# Altium PCB ACT01_RS232 V3.0.PcbDoc
Units mm, origin at the board's own origin, x right, y up, seen from the top; angles counter-clockwise.
Board outline 36 x 28 mm, 2 copper layers (Top Layer, Bottom Layer), stack 0.325 mm thick; 38 components, 24 nets, 106 pads, 69 vias.
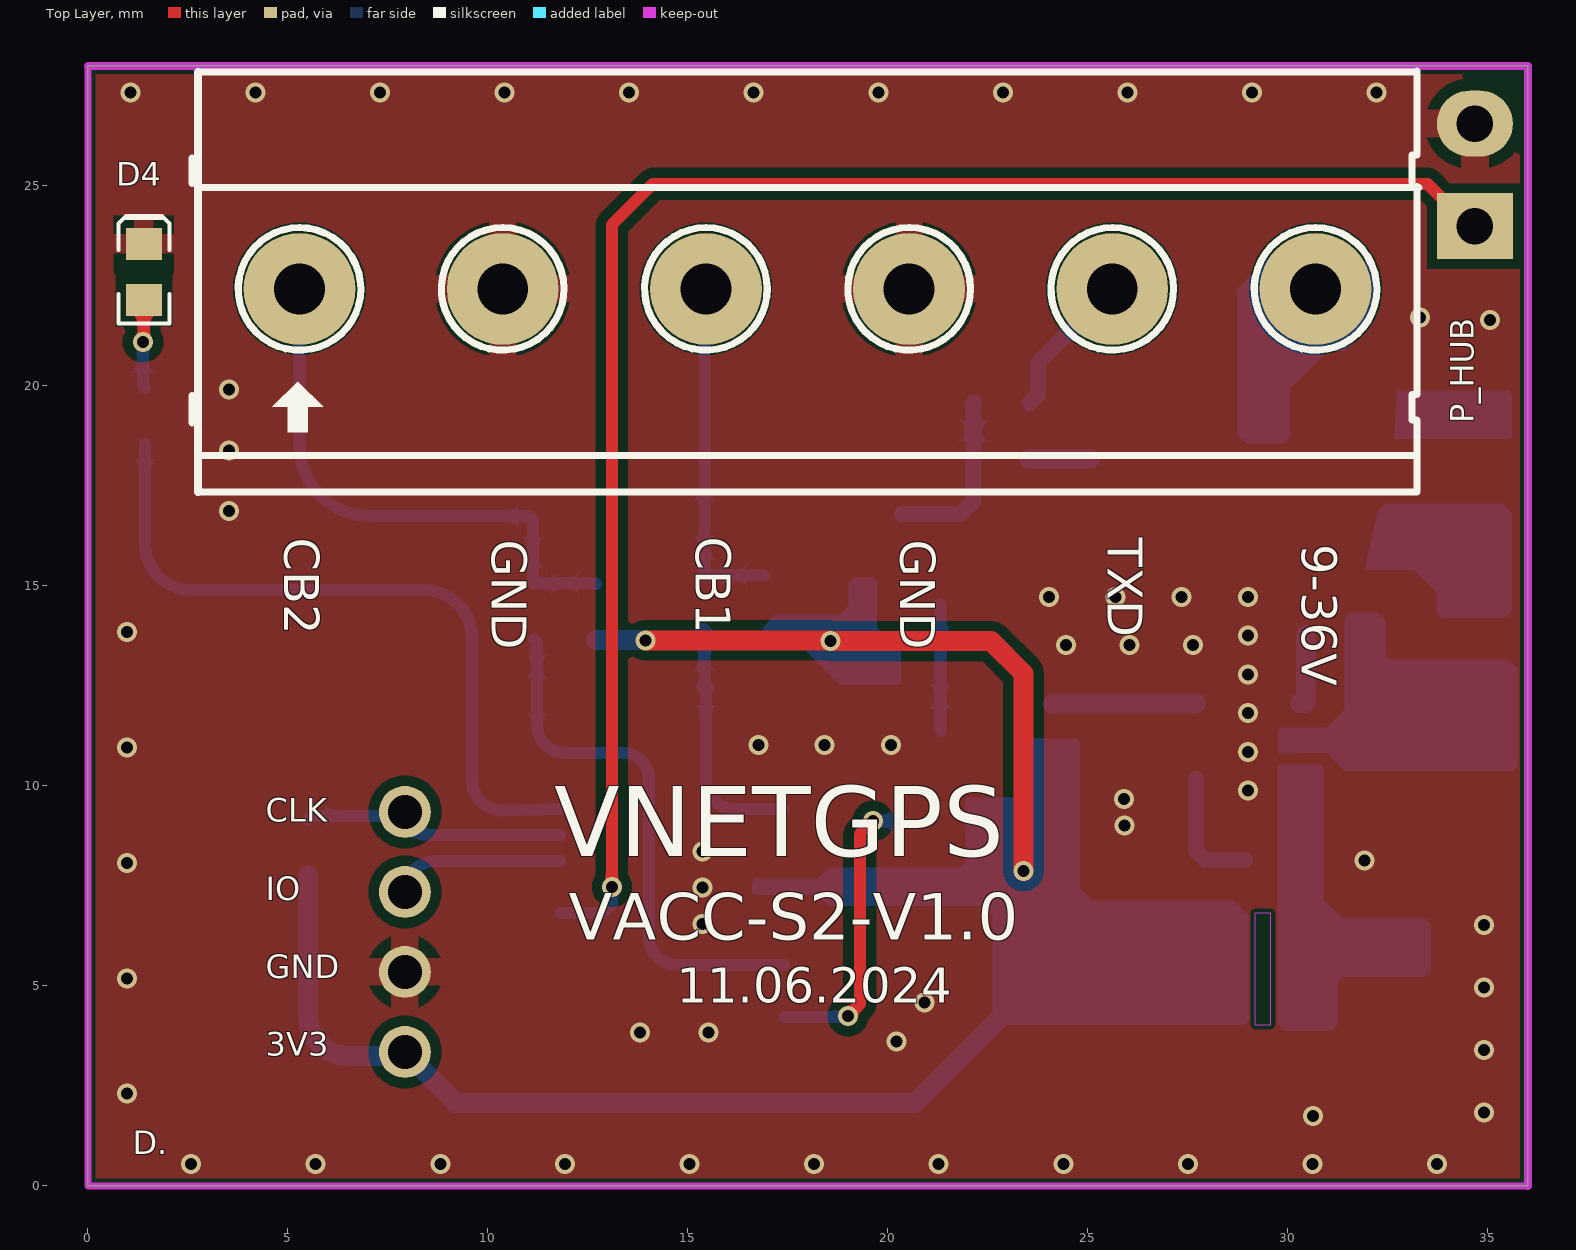
[diagram p0: Top Layer view]
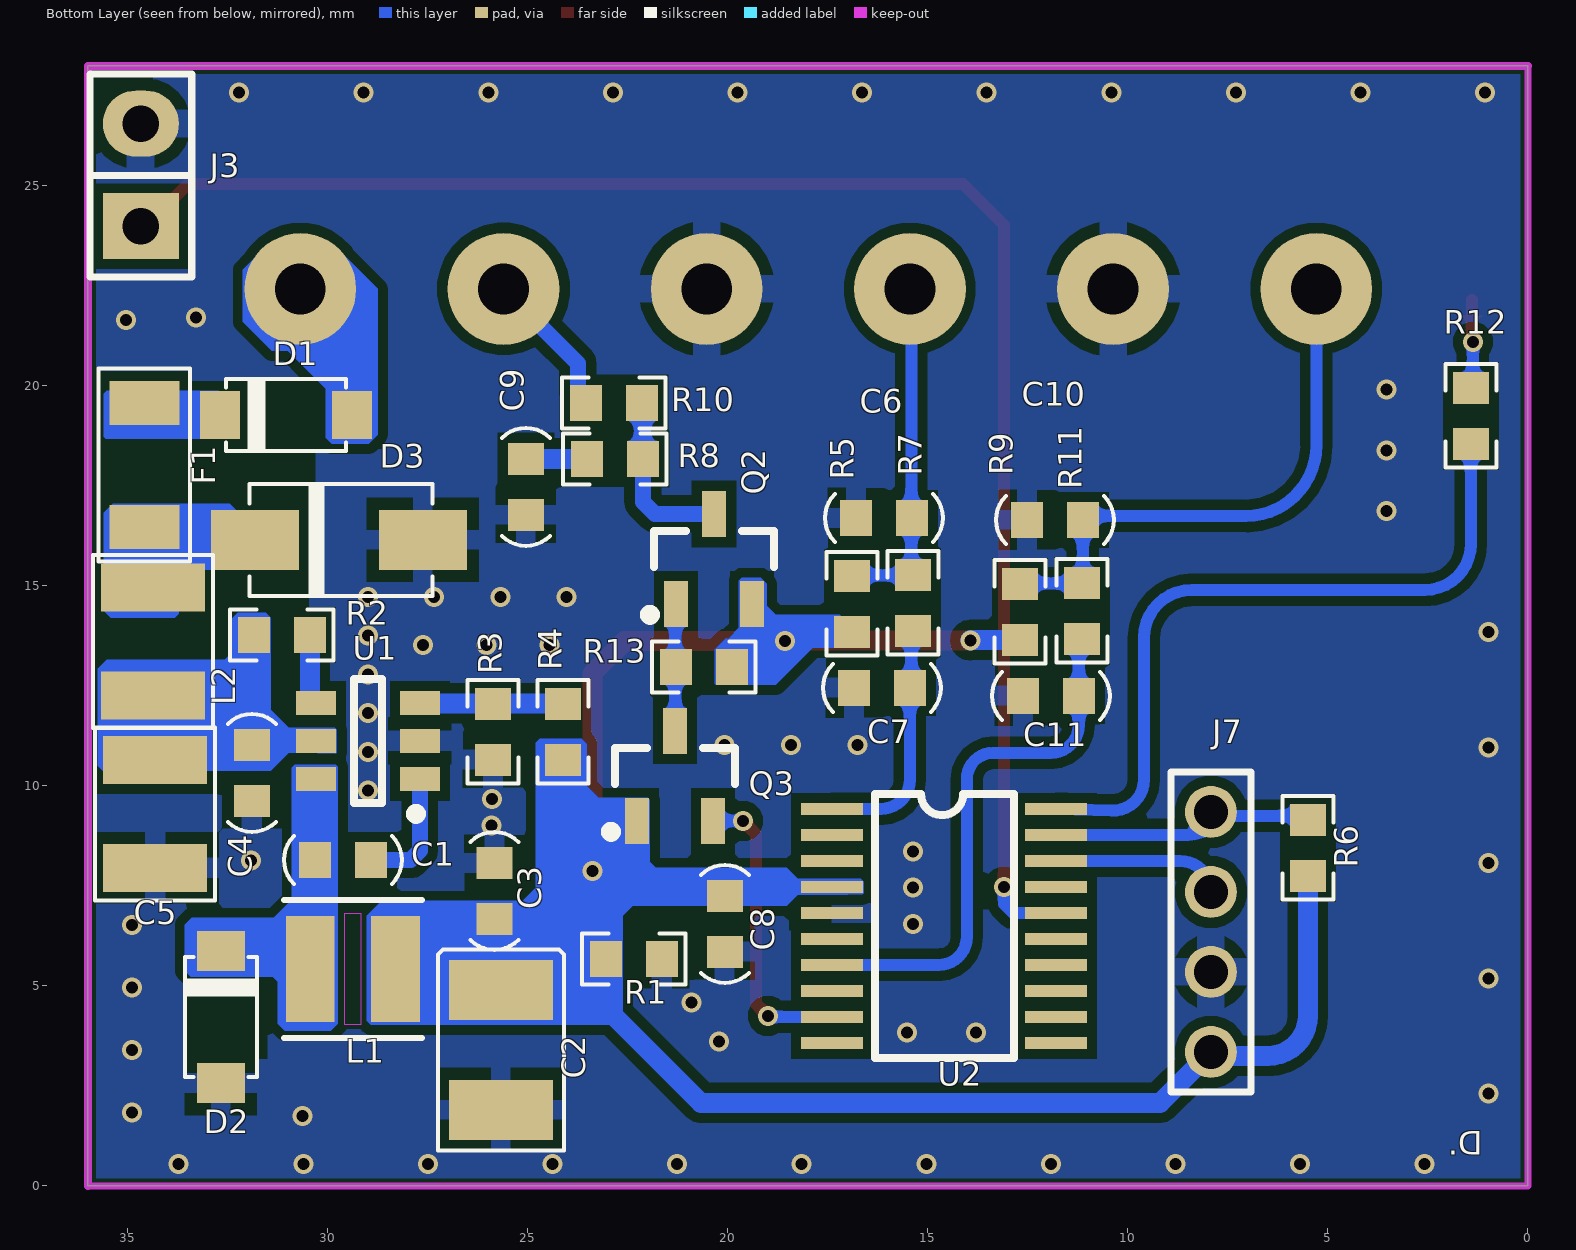
[diagram p1: Bottom Layer view, seen from below]

## Layer stack, top to bottom
Top Solder: solder mask 0.0102, Solder Resist, Dk 3.5
Top Layer: signal copper 0.0356
Dielectric 1: core 0.254, FR-4, Dk 4.2
Bottom Layer: signal copper 0.0356
Bottom Solder: solder mask 0.0102, Solder Resist, Dk 3.5

## Board outline
0,0 36,0 36,28 0,28

## Design rules (kind name [scope] priority, off if disabled: settings)
Clearance KeepOut [OnLayer('Keep-Out Layer')] p1: gap=0.1 ignorepadtopadclearanceinfootprint=FALSE
Clearance Polygon [InNamedPolygon('BOT GND')or InNamedPolygon('TOP GND')] p2: gap=0.4 ignorepadtopadclearanceinfootprint=FALSE
Clearance [All] p3: gap=0.254 ignorepadtopadclearanceinfootprint=FALSE
MinimumSolderMaskSliver [All] p1: minsoldermaskwidth=0
PlaneConnect [All] p1: planeconnectstyle=Direct reliefexpansion=0.508 reliefentries=4 reliefconductorwidth=0.254 reliefairgap=0.254
PolygonConnect [All] p1: thpad.connectstyle=Relief thpad.reliefconductorwidth=0.7 thpad.reliefentries=4 thpad.polygonreliefangle="90 Angle" thpad.airgapwidth=0.3 smdpad.connectstyle=Relief smdpad.reliefconductorwidth=0.5 smdpad.reliefentries=4 smdpad.polygonreliefangle="90 Angle" smdpad.airgapwidth=0.3 via.connectstyle=Direct via.reliefconductorwidth=0.254 via.reliefentries=4 via.polygonreliefangle="90 Angle" via.airgapwidth=0.254
RoutingCorners [All] p1: cornerstyle=45-Degree minsetback=1.27 maxsetback=1.27
RoutingVias [All] p1: holewidth=0.3 width=0.5 viastyle="Through Hole" minholewidth=0.3 minwidth=0.5 maxholewidth=0.3 maxwidth=0.5
SMDNeckDown [All] p1: percent=100.000
SilkToSilkClearance [All] p1: silktosilkclearance=0
SilkToSolderMaskClearance [IsPad] p1: minsilkscreentomaskgap=0 clearancetoexposedcopper=TRUE
SolderMaskExpansion [All] p1: expansion=0.102 istentingtop=FALSE
UnRoutedNet [All] p1: checkbadconnections=TRUE
Width [All] p1: maxlimit=1.27 minlimit=0.203 preferedwidth=0.254
24 further rules are at their usual default settings.

## Components (designator, comment, footprint, x,y, rotation, side; value= is the part's Value field where it differs from the comment)
C1 "100nF" "0603 - C" 29.625,8.15 r0 bottom
C2 "107B" "3528 - TANTALUM" 25.675,3.4 r270 bottom value=100uF/6.3V
C3 "100nF" "0603 - C" 25.84,7.375 r270 bottom
C4 "100nF" "0603 - C" 31.9,10.325 r90 bottom
C5 "3.3uF/100V" "1210 - C" 34.32,9.3 r90 bottom
C6 "100nF" "0603 - C" 16.1,16.7 r180 bottom
C7 "100nF" "0603 - C" 16.15,12.45 r180 bottom
C8 "100nF" "0603 - C" 20.075,6.55 r90 bottom
C9 "100nF" "0603 - C" 25.05,17.475 r90 bottom
C10 "100nF" "0603 - C" 11.825,16.65 r180 bottom
C11 "100nF" "0603 - C" 11.925,12.25 r180 bottom
D1 "1N4148" SOD-123 31.05,19.275 r90 bottom
D2 "60V 2A" SOD-123 32.675,4.223 r180 bottom
D3 "SMAJ30A" "Diode - SMA" 29.725,16.15 r180 bottom
D4 "RED" "LED - 0603 - R" 1.4,22.85 r90 top
F1 "Fuse 30V" "1206 - Fuse" 34.59,18.02 r270 bottom
H1 "KF128-6P" "KF128 - 6P" 5.29,22.425 r0 top locked
J3 "Jumper 2" JP2 34.675,25.275 r90 bottom
J7 "Jumper 4" "JP4 2mm" 7.925,9.35 r270 bottom
L1 "SWPA3015S330MT" IND_3X3 29.375,5.425 r180 bottom
L2 "2.2uH" "1210 - L" 34.37,13.61 r270 bottom
Q2 "2N3906" SOT23B 20.35,15.675 r90 bottom
Q3 "2N3904" SOT23B 21.325,10.25 r90 bottom
R1 "3.3K" "0603 - R" 22.35,5.675 r0 bottom
R2 "1M" "0603 - R" 31.15,13.775 r0 bottom
R3 "15K" "0603 - R" 25.875,11.35 r270 bottom
R4 "47K" "0603 - R" 24.125,11.35 r270 bottom
R5 "10K" "0603 - R" 16.9,14.55 r270 bottom
R6 "10K" "0603 - R" 5.5,8.45 r270 bottom
R7 "10R" "0603 - R" 15.375,14.575 r270 bottom
R8 "10K" "0603 - R" 22.825,18.175 r180 bottom
R9 "10K" "0603 - R" 12.7,14.35 r270 bottom
R10 "1K" "0603 - R" 22.85,19.575 r0 bottom
R11 "10R" "0603 - R" 11.15,14.375 r270 bottom
R12 "3.3K" "0603 - R" 1.425,19.25 r270 bottom
R13 "1K" "0603 - R" 20.6,12.975 r180 bottom
U1 "HT7463A" SOT23-6_L 29,11.125 r0 bottom locked
U2 "STM32G030F6P6TR" TSSOP20 14.6,6.5 r180 bottom locked

## Footprints (in the part's own frame and the unit in brackets; to place one, negate y for a bottom-side part, rotate by r counter-clockwise, add the part's x,y. Pads: shape width x height; smd on the part's side, far side on the other; paste and mask are expansions set on the pad)
"0603 - C" [mm] "Chip Capacitor, Body 1.6x0.8mm, IPC High Density"
  rect 0.8x0.9 smd: 1(-0.7,0) 2(0.7,0)
  silkscreen extent -1.47,-0.6 1.47,0.6, body extent -0.8,-0.4 0.8,0.4, height 0.8
"0603 - R" [mm] "Chip Resistor, Body 1.6x0.8mm, IPC High Density"
  rect 0.8x0.9 smd paste-0.025: 1(-0.7,0) 2(0.7,0)
  silkscreen extent -1.3,-0.64 1.3,0.64, body extent -0.77,-0.42 0.78,0.43, height 0.45
"1206 - Fuse" [mm] "Chip Resetable Fuse,  Body 3.22x1.6mm, IPC High Density"
  rect 1.1x1.75 smd: 1(-1.55,0) 2(1.55,0)
  silkscreen extent -2.41,-1.14 2.41,1.14, body extent -1.6,-0.8 1.6,0.8, height 1
"1210 - C" [mm] "Chip Capacitor, Body 3.2x2.5mm, IPC High Density"
  rect 1.2x2.6 smd: 1(-1.35,0) 2(1.35,0)
  silkscreen extent -2.16,-1.5 2.16,1.5, body extent -1.6,-1.25 1.6,1.25, height 2.5
"1210 - L" [mm] "Chip Capacitor, Body 2.54x1.27mm, IPC High Density"
  rect 1.2x2.6 smd: 1(-1.35,0) 2(1.35,0)
  silkscreen extent -2.16,-1.5 2.16,1.5, body extent -1.6,-1.25 1.6,1.25, height 1.9
"3528 - TANTALUM" [mm] "Chip Inductor, Body 3.2x1.6mm, IPC High Density"
  rect 1.5x2.6 smd: 1(-1.5,0) 2(1.5,0)
  silkscreen extent -2.51,-1.57 2.51,1.57, body extent -1.78,-1.38 1.72,1.42, height 1.9
"Diode - SMA" [mm] "Diode; 2 Leads"
  rect 2.2x1.5 smd: 1(2.1,0) 2(-2.1,0)
  silkscreen extent -2.24,-1.4 2.34,1.4, body extent -2.67,-1.4 2.83,1.4, height 2.6
IND_3X3 [mil] "3x3x1.5mm"
  rect 48x104 smd paste+0 mask+0: 1(-42,0) 2(42,0)
  Keep-Out Layer region: -7.87,-55 -7.87,55 7.87,55 7.87,-55
  silkscreen extent -68,-68 68,68, body extent -63,-63 63,63, height 61
JP2 [mil] "Jumper 2, 2.54x2p"
  rect 65x75 hole 36.02: 1(-50.5,0)
  oval 65x75 hole 36.02: 2(50.5,0)
  silkscreen extent -100,-50 100,50
"JP4 2mm" [mm]
  round 1.3 hole 0.85: 1(0,0) 2(2,0) 3(4,0) 4(6,0)
  silkscreen extent -1,-1 7,1
"KF128 - 6P" [mil] "Header 3,pitch 5.08mm, Colour Green"
  round 110 hole 50: 1(0,0) 2(200,0) 3(400,0) 4(600,0) 5(800,0) 6(1000,0)
  silkscreen extent -106,-200 1102,215, body extent -114,-198 1101,216, height 563
"LED - 0603 - R" [mm] "Chip Capacitor, Body 1.6x0.8mm, IPC High Density"
  rect 0.8x0.9 smd: 1(-0.7,0) 2(0.7,0)
  silkscreen extent -1.3,-0.64 1.4,0.64, body extent -0.8,-0.4 0.8,0.4, height 0.6
SOD-123 [mm] "SOD123, 2-Leads, Body 2.6x1.6mm, Pitch 3.05mm, IPC High Density"
  rect 1.2x1 smd: 1(0,-1.652) 2(0,1.652)
  silkscreen extent -0.9,-1.5 0.9,1.5, body extent -0.8,-1.85 0.8,1.85, height 1.27
SOT23-6_L [mm] "SOT23, 6-Leads, Body 2.9x1.6mm, Pitch 0.95mm, Lead Span 2.7mm, IPC High Density"
  rect 1x0.6 smd paste-0.025: 1(-1.3,0.95) 2(-1.3,0) 3(-1.3,-0.95) 4(1.3,-0.95) 5(1.3,0) 6(1.3,0.95)
  silkscreen extent -1.32,-1.55 0.35,1.95, body extent -1.4,-1.45 1.4,1.45, height 1.45
SOT23B [mm] "SOT23, 3-Leads, Body 2.9x1.3mm, Pitch 0.95mm, Lead Span 2.4mm, IPC High Density"
  rect 1.15x0.6 smd: 1(-1.125,0.95) 2(-1.125,-0.95) 3(1.125,0)
  silkscreen extent -1.52,-1.5 0.7,1.73, body extent -1.25,-1.5 1.25,1.5, height 1.05
TSSOP20 [mm] "20-Lead, Body 4.4x6.4x6.5mm, IPC High Density"
  rect 1.55x0.3 smd: 1(-2.8,2.925) 2(-2.8,2.275) 3(-2.8,1.625) 4(-2.8,0.975) 5(-2.8,0.325) 6(-2.8,-0.325) 7(-2.8,-0.975) 8(-2.8,-1.625) 9(-2.8,-2.275) 10(-2.8,-2.925) 11(2.8,-2.925) 12(2.8,-2.275) 13(2.8,-1.625) 14(2.8,-0.975) 15(2.8,-0.325) 16(2.8,0.325) 17(2.8,0.975) 18(2.8,1.625) 19(2.8,2.275) 20(2.8,2.925)
  silkscreen extent -1.73,-3.3 1.75,3.3, body extent -3.27,-3.3 3.28,3.3, height 1.2

## Part data
C1 C3 C4 C6 C7 C8 C9 C10 C11: library part "Cap 0603 100nF", "CAP CER 100nF 50V C0G/NP0 0603", MFR=SAMSUNG, MPN=CL10C104JB8NNNC, Package=0603, Voltage=50V, Size="C0603: 100nF"
  C1 C3 C4 C6 C7 C10 C11: Company ID="VT_TỤ ĐIỆN_C0603 100nF"
  C8 C9: Company ID="VT_CAP_C0603 100nF"
C2: library part "Cap Tan 3528 100uF/6.3V", "CAP TANT 100UF 6.3V 10% 1411", MFR=Kemet, MPN=T491B107K006AT, Company ID="VT_CAP TAN 100uF 6.3V"
C5: library part "Cap 1210 3.3uF", "CAP CER 3.3UF 100V X7S 1210", MFR="TDK Corporation", MPN=C3225X7S2A335M200AB, MPN2=885012209071, Company ID="VT_CAP_C1210 3.3uF 100V", Size="C1210: 3.3uF/100V"
D1: library part "Diode 1N4148", "DIODE GEN PURP 100V 300MA SOD123", MFR=DIODES, MPN=1N4148W-7-F, Company ID=VT_DIODE_1N4148W-7-F
D2: library part "Diode PMEG6020ER", "DIODE SCHOTTKY 60V 2A SOD123W", MFR=NXP, MPN=PMEG6020ER,115, Company ID=VT_DIODE_PMEG6020ER
D3: library part "Diode SMAJ30A", "TVS DIODE 30V 48.4V DO214AC", MFR="Littelfuse Inc.", Company ID="VT_DIODE_ SMAJ30A", MPN=SMAJ30A
D4: library part "LED 0603 RED", "LED RED CLEAR 0603 SMD", MFR=Everlight, MPN=QTLP601CRTR, Company ID="VT_LED_0603 RED", Size="LED 0603 - RED"
F1: library part "Fuse 30V - 0.125A", "PTC RESET FUSE 30V 0.125A 1206", MFR=BrightKing, MPN=SMD1206B012TF, Company ID="VT_Fuse_30V - 0.125A"
H1: library part "HD KF128 6P", "6-Pin Plug-in Terminal Block Connector 5.08mm Pitch Through Hole", MFR=China, MPN="KF128 - 6P", Company ID="VT_CONN_KF128 6P"
J3: library part JP2, "Jumper 2, 2.54mmx2"
J7: library part JP4, "Jumper 4, 2.54mmx4"
L1: library part "Inductor 33uH", "FIXED IND 33UH 430MA 1.066OHM SM", MFR="Shenzhen Sunlord Electronics Co., Ltd.", Company ID=xx, MPN=SWPA3015S330MT
L2: library part "Inductor 3225 2.2uH", "FIXED IND 2.2UH 1.6A 76 MOHM SMD", MFR=Murata, MPN=LQH32PN2R2NN0, MPN2=SWPA3015S2R2NT, Company ID="VT_IND_3225 2.2uH", Size="L3225: 2.2uH"
Q2: library part "Transistor 2N3906", "TRANS PNP 40V 0.2A SOT23", MFR=Fairchild, MPN=MMBT3906, Company ID=VT_TRANSISTOR_3906
Q3: library part "Transistor 2N3904", "TRANS NPN 40V 0.2A SOT-23", MFR=Fairchild, MPN=MMBT3904, Company ID=VT_TRANSISTOR_3904
R1 R12: library part "Res 0603 3.3K", "RES SMD 3.3K OHM 1% 1/10W 0603", MFR=Yageo, MPN=RC0603FR-073K3L, Company ID="VT_RES_R0603 3.3K", Size="R0603: 3.3K"
R2: library part "Res 0603 1M", "RES SMD 1M OHM 1% 1/10W 0603", MFR=Yageo, MPN=RC0603FR-071ML, Company ID="VT_ĐIỆN TRỞ_R0603 1M"
R3: library part "Res 0603 15K", "RES SMD 15K OHM 1% 1/10W 0603", MFR=Yageo, MPN=RC0603FR-0715KL, Company ID="VT_ĐIỆN TRỞ_R0603 15K", Size="R0603: 15K"
R4: library part "Res 0603 47K", "RES SMD 47K OHM 1% 1/10W 0603", MFR=Yageo, MPN=RE0603FRE0747KL, Company ID="VT_RES_R0603 47K", Size="R0603: 47K"
R5 R6 R8 R9: library part "Res 0603 10K", "RES SMD 10K OHM 1% 1/10W 0603", MFR=Yageo, MPN=RC0603FR-0710KL, Size="R0603: 10K"
  R5 R8 R9: Company ID="VT_RES_R0603 10K"
  R6: Company ID="VT_ĐIỆN TRỞ_R0603 10K"
R7 R11: library part "Res 0603 10R", "RES SMD 10 OHM 1% 1/10W 0603", MFR=Yageo, MPN=RC0603FR-0710RL, Company ID="VT_RES_R0603 10R", Size="R0603: 10R"
R10 R13: library part "Res 0603 1K", "RES SMD 1K OHM 1% 1/10W 0603", MFR=Yageo, MPN=RC0603FR-071KL, Company ID="VT_ĐIỆN TRỞ_R0603 1K", Size="R0603: 1K"
U1: library part HT7463A/HT7463B, "52V/600mA, 1.25MHz/550kHz / Asynchronous Step Down Converter", MFR=Holtek, Company ID=VT_IC_HT7463A, MPN=HT7463A
U2: "IC MCU 32BIT 32KB FLASH 20TSSOP", MPN=STMicroelectronics, Company ID=VT_IC_STM32G030F6P6TR, MFR=STM32G030F6P6TR

## Via types
v1: diameter 0.5, hole 0.3, Top Layer to Bottom Layer, tented both sides, 69 vias

## Nets (pads, with @x,y where several pads share a name; then routed paths per layer and width w, separated by ;. In a path a pad name is that pad's centre, name@x,y a point inside that pad or via, vN(x,y) a via of type N, cw(c..) or ccw(c..) an arc to the next point about the centre after c; other vN are vias at no path point)
3V3: C2.1 C3.2 C8.2 J7.4 L1.2 Q2.2 Q3.1 R1.2 R4.2 R5.2 R6.2 R9.2 R13.2 U2.4 | length 39
  Top Layer w0.5: v1(13.94,13.64) 18.55,13.64 v1(18.57,13.62) 22.58,13.62 23.39,12.81 v1(23.39,7.87)
  Bottom Layer w0.5: R6.2 5.5,4.25 ccw(c6.5,4.25) 6.5,3.25 7.825,3.25 ccw(c7.825,3.35) J7.4 9.2,2.075 20.675,2.075 22.925,4.325 ; R9.2 13.93,13.65 v1(13.94,13.64)
CB_1: C6.2 H1.3 R5.1 R7.1 | length 8.7
  Bottom Layer w0.3: H1.3 15.412,22.387 15.412,15.312 R7.1 15.387,15.262 16.888,15.262 R5.1
CB_2: C10.2 H1.1 R9.1 R11.1 | length 13.9
  Bottom Layer w0.3: H1.1 5.29,18.51 ccw(c7.05,18.51) 5.574,17.551 ccw(c7.05,18.51) 6.091,17.034 ccw(c7.05,18.51) 7.05,16.75 11.025,16.75 C10.2 11.125,15.1 R11.1 11.162,15.062 12.688,15.062 R9.1
CB_ADC_1: C7.2 R7.2 U2.1 | length 6.1
  Bottom Layer w0.3: C7.2@15.412,12.488 R7.2@15.412,13.837 ; C7.2 15.45,10.15 ccw(c16.175,10.15) 15.65,9.65 ccw(c16.175,10.15) 15.675,9.625 ccw(c16.175,10.15) 16.175,9.425 U2.1
  Bottom Layer w0.4: R7.2 R7.2@15.412,13.837 ; C7.2@15.412,12.488 C7.2
CB_ADC_2: C11.2 R11.2 U2.7 | length 13.5
  Bottom Layer w0.3: R11.2 11.225,13.6 C11.2 11.225,11.525 ccw(c11.925,11.525) 11.925,10.825 13.375,10.825 cw(c13.375,10.175) 14.025,10.175 14.025,6.225 ccw(c14.725,6.225) 14.725,5.525 U2.7
GND: C2.2 C3.1 C4.1 C5.1 C6.1 C7.1 C8.1 C9.1 C10.1 C11.1 D2.1 D3.1 D4.2 H1.2 H1.4 J3.2 J7.3 R1.1 R3.2 U1.2 U2.5
  other v1: 2.58,0.55 5.695,0.55 8.81,0.55 11.925,0.55 15.04,0.55 18.155,0.55 21.27,0.55 24.385,0.55 27.5,0.55 30.615,0.55 33.73,0.55 30.63,1.75 34.9,1.84 0.98,2.305 34.9,3.4 20.22,3.61 13.8,3.83 15.52,3.83 20.91,4.59 34.9,4.96 0.98,5.19 34.9,6.52 15.37,6.55 15.37,7.455 0.98,8.075 31.92,8.13 15.37,8.36 25.91,9.01 25.9,9.67 29,9.886 29,10.854 0.98,10.96 16.76,11.02 18.42,11.02 20.08,11.02 29,11.822 29,12.79 24.457,13.52 26.04,13.52 27.623,13.52 29,13.758 0.98,13.845 24.03,14.726 25.687,14.726 27.343,14.726 29,14.726 3.53,16.87 3.53,18.39 3.53,19.91 35.05,21.65 33.3,21.71 1.07,27.34 4.185,27.34 7.3,27.34 10.415,27.34 13.53,27.34 16.645,27.34 19.76,27.34 22.875,27.34 25.99,27.34 29.105,27.34 32.22,27.34
LED: R12.2 U2.20 | length 18.2
  Bottom Layer w0.3: R12.2 1.425,16.05 ccw(c2.575,16.05) 2.575,14.9 8.4,14.9 cw(c8.4,13.7) 9.6,13.7 9.6,10.152 ccw(c10.365,10.152) 10.408,9.388 U2.20
MCU_IN: J3.1 U2.16 | length 40.8
  Top Layer w0.3: v1(13.1,7.475) 13.1,24.025 14.125,25.05 33.49,25.05 34.548,23.992 J3.1
  Bottom Layer w0.3: U2.16 12.875,6.825 13.1,7.05 v1(13.1,7.475)
NetC1_1: C1.1 U1.1 | length 3.1
  Bottom Layer w0.4: U1.1 27.7,8.384 27.934,8.15 C1.1
NetC1_2: C1.2 D2.2 L1.1 U1.6
NetC9_2: C9.2 R8.1 | length 1.5
  Bottom Layer w0.5: R8.1 C9.2
NetD1_2: D1.2 F1.1
NetD3_2: D3.2 F1.2 L2.1
NetD4_1: D4.1 R12.1 | length 2.2
  Top Layer w0.3: v1(1.375,21.1) 1.4,21.125 D4.1
  Bottom Layer w0.3: v1(1.375,21.1) 1.375,20 R12.1
NetQ2_1: Q2.1 Q3.3 R13.1 | length 3.2
  Bottom Layer w0.3: Q2.1 21.312,14.537 21.312,11.388 Q3.3
NetQ2_3: Q2.3 R8.2 R10.1 | length 4.4
  Bottom Layer w0.4: Q2.3 21.825,16.8 22.125,17.1 R8.2 22.137,18.188 22.137,19.562 R10.1
NetR2_1: R2.1 U1.4 | length 1.8
  Bottom Layer w0.5: U1.4 30.4,12.075 30.45,12.125 R2.1
NetR3_1: R3.1 R4.1 U1.3 | length 3.6
  Bottom Layer w0.5: R4.1 24.137,12.062 27.687,12.062 U1.3
SWCLK: J7.1 R6.1 U2.19 | length 6.7
  Bottom Layer w0.3: R6.1 5.6,9.25 7.825,9.25 J7.1 ccw(c8.5,9.35) 8.5,8.775 U2.19
SWDIO: J7.2 U2.18 | length 4.3
  Bottom Layer w0.3: J7.2 cw(c8.7,7.35) 8.7,8.125 U2.18
TXD: H1.5 R10.2 | length 3.7
  Bottom Layer w0.4: R10.2 23.75,19.775 23.75,20.565 H1.5
UART2_TX: Q3.2 U2.9 | length 7.5
  Top Layer w0.3: v1(19,4.25) 19.3,4.55 19.3,8.8 v1(19.625,9.125)
  Bottom Layer w0.3: U2.9 18.975,4.225 v1(19,4.25) ; v1(19.625,9.125) Q3.2
VIN: D1.1 H1.6
VIN_1: C4.2 C5.2 L2.2 R2.2 U1.5
pads on no net: U2.2 U2.3 U2.6 U2.8 U2.10 U2.11 U2.12 U2.13 U2.14 U2.15 U2.17

## Polygon pours and split planes (outlines as drawn)
GND on Top Layer "GND_L01_P000" (solid, remove dead copper, pour order 0): 0,0 36,0 36,28 0,28
GND on Bottom Layer "GND_L02_P001" (solid, remove dead copper, pour order 1): 0,0 36,0 36,28 0,28

## Keep-outs
Keep-Out Layer:
  the board outline again, w0.2

## Other copper
Bottom Layer:
  region net NetD3_2: 31.925,15.4 33.15,15.4 33.725,14.825 33.725,14.3 33.825,14.2 35.425,14.2 35.6,14.375 35.6,16.825 35.375,17.05 32.45,17.05 32.25,16.85
  pour cut-out: 33.524,3.17 31.509,3.17 31.509,5.225 33.524,5.225
  pour cut-out: 31.948,20.129 30.31,20.129 30.31,17.154 31.948,17.154
  pour cut-out: 30.471,14.39 30.88,14.39 30.88,15.18 30.471,15.18
  pour cut-out: 31.948,17.04 32.16,17.04 32.16,18.46 31.948,18.46
  region net 3V3: 17.258,13.45 17.875,13.45 18.8,12.525 20.3,12.525 20.325,12.55 20.325,13.418 20.064,13.679 19.996,13.679 19.725,13.95 19.725,15.125 19.65,15.2 19.175,15.2 19.025,15.05 19.025,14.5 18.8,14.275 17.2,14.275 16.9,13.975 16.9,13.719
  region net 3V3: 17.005,7.275 16.649,7.275 16.606,7.318 16.606,7.606 16.675,7.675 18.25,7.675 18.525,7.95 21.8,7.95 21.95,8.1 21.95,9.65 22,9.7 23.225,9.7 23.525,10 23.525,11.05 23.65,11.175 24.7,11.175 24.8,11.075 24.8,7.45 25.125,7.125 28.65,7.125 29.025,6.75 29.025,4.125 28.925,4.025 22.85,4.025 22.625,4.25 22.625,6.75 22.375,7 18.525,7 18.25,7.275
  region net NetC1_2: 29.75,4.05 29.925,3.875 31.075,3.875 31.25,4.05 31.25,5.1 31.375,5.225 33.425,5.225 33.575,5.375 33.575,6.535 33.41,6.7 31.35,6.7 30.9,7.15 30.9,10.45 30.825,10.525 29.8,10.525 29.75,10.475
  region net VIN_1: 30.7,10.825 30.975,10.825 31.425,10.375 35.625,10.375 35.75,10.5 35.75,12.925 35.525,13.15 32.575,13.15 32.45,13.275 32.45,14.125 32.25,14.325 31.55,14.325 31.425,14.2 31.425,11.9 30.975,11.45 29.825,11.45 29.775,11.4 29.775,10.825 29.8,10.8
  region net NetD1_2: 35.525,19.875 35.6,19.8 35.6,18.725 35.55,18.675 32.677,18.675 32.727,19.875
  region net VIN: 28.75,22.425 29.725,23.4 31.625,23.4 32.125,22.9 32.125,21.6 31.4,20.875 31,20.875 30.05,19.925 30.05,18.7 29.9,18.55 28.975,18.55 28.75,18.775

## Silkscreen, mask and mechanical layers (free items; w line width, h text height)
Top Overlay:
  text "P_HUB" at 34.842,19.07 h1 r90
  text "CB1" at 14.912,16.233 h1.5 r270
  text "CB2" at 4.622,16.208 h1.5 r270
  text "TXD" at 25.204,16.202 h1.5 r270
  text "GND" at 9.806,16.158 h1.5 r270
  text "GND" at 20.021,16.158 h1.5 r270
  text "9-36V" at 30.062,16.042 h1.5 r270
  text "CLK" at 4.45,8.9 h1
  text "VNETGPS" at 11.652,7.662 h3
  text "IO" at 4.45,6.947 h1
  text "VACC-S2-V1.0" at 12.027,5.772 h2
  text "GND" at 4.45,4.993 h1
  text "11.06.2024" at 14.718,4.287 h1.5
  text "3V3" at 4.45,3.05 h1
  text "D." at 1.126,0.59 h1
Bottom Overlay:
  text "D." at 1.13,0.58 h1